# EAGLE board CT_schematic (EAGLE 7.6.0)

Size 100 x 80 mm. Coordinates in mm from the lower left corner, seen from the top.
Outline: 0,0 100,0 100,80 0,80 0,0
Copper layers (1*16): Top 0.035mm / dielectric 1.5mm / Bottom 0.035mm
Design rules "default": minimum track width 10mil, minimum drill 24mil, track to track 8mil, track to pad 8mil, pad to pad 8mil, via to via 8mil, smd to smd 8mil, copper to edge 40mil, drill to drill 8mil, minimum pad ring 10mil, minimum via ring 8mil, stop-mask expansion 4mil, vias tented up to drill 0mil, thermal gap 10mil

## Footprints (pad centres in the part's own frame; a part is rotated, then mirrored left to right if it is on the bottom)
C0603 = smd 0.8 x 0.8: 1 -0.762,0; 2 0.762,0
C0402 = smd 0.5 x 0.5: 1 -0.508,0; 2 0.508,0
C0805 = smd 1.2 x 1.3: 1 -1.016,0; 2 1.016,0
C1210 = smd 1.2 x 2.5: 1 -1.524,0; 2 1.524,0
C1206 = smd 1.3 x 1.6: 1 -1.524,0; 2 1.524,0
EXV-9H = smd 3.505 x 1.676: 1 -2.857,0; 2 2.857,0
L0603 = smd 0.8 x 0.8: 1 -0.762,0; 2 0.762,0
L1210 = smd 1.2 x 2.5: 1 -1.524,0; 2 1.524,0
PJ-037B_PACKAGE = drill 3.7 square: 1 12,0 | drill 3.2 square: 2 6,0
R0603 = smd 0.8 x 0.8: 1 -0.762,0; 2 0.762,0
WLCSP90 = smd 0.25 x 0.25: A1 -1.8,1.6; A2 -1.4,1.6; A3 -1,1.6; A4 -0.6,1.6; A5 -0.2,1.6; A6 0.2,1.6; A7 0.6,1.6; A8 1,1.6; A9 1.4,1.6; A10 1.8,1.6; B1 -1.8,1.2; B2 -1.4,1.2; B3 -1,1.2; B4 -0.6,1.2; B5 -0.2,1.2; B6 0.2,1.2; B7 0.6,1.2; B8 1,1.2; B9 1.4,1.2; B10 1.8,1.2; C1 -1.8,0.8; C2 -1.4,0.8; C3 -1,0.8; C4 -0.6,0.8; C5 -0.2,0.8; C6 0.2,0.8; C7 0.6,0.8; C8 1,0.8; C9 1.4,0.8; C10 1.8,0.8; D1 -1.8,0.4; D2 -1.4,0.4; D3 -1,0.4; D4 -0.6,0.4; D5 -0.2,0.4; D6 0.2,0.4; D7 0.6,0.4; D8 1,0.4; D9 1.4,0.4; D10 1.8,0.4; E1 -1.8,0; E2 -1.4,0; E3 -1,0; E4 -0.6,0; E5 -0.2,0; E6 0.2,0; E7 0.6,0; E8 1,0; E9 1.4,0; E10 1.8,0; F1 -1.8,-0.4; F2 -1.4,-0.4; F3 -1,-0.4; F4 -0.6,-0.4; F5 -0.2,-0.4; F6 0.2,-0.4; F7 0.6,-0.4; F8 1,-0.4; F9 1.4,-0.4; F10 1.8,-0.4; G1 -1.8,-0.8; G2 -1.4,-0.8; G3 -1,-0.8; G4 -0.6,-0.8; G5 -0.2,-0.8; G6 0.2,-0.8; G7 0.6,-0.8; G8 1,-0.8; G9 1.4,-0.8; G10 1.8,-0.8; H1 -1.8,-1.2; H2 -1.4,-1.2; H3 -1,-1.2; H4 -0.6,-1.2; H5 -0.2,-1.2; H6 0.2,-1.2; H7 0.6,-1.2; H8 1,-1.2; H9 1.4,-1.2; H10 1.8,-1.2; J1 -1.8,-1.6; J2 -1.4,-1.6; J3 -1,-1.6; J4 -0.6,-1.6; J5 -0.2,-1.6; J6 0.2,-1.6; J7 0.6,-1.6; J8 1,-1.6; J9 1.4,-1.6; J10 1.8,-1.6
SAMTEC_FTSH-105-01-L-DV-K = smd 0.762 x 2.794: 1 -2.54,-2.032; 2 -2.54,2.032; 3 -1.27,-2.032; 4 -1.27,2.032; 5 0,-2.032; 6 0,2.032; 7 1.27,-2.032; 8 1.27,2.032; 9 2.54,-2.032; 10 2.54,2.032
AT24C02D = smd 1.6 x 0.6: 1 -2.475,1.905 | smd 1.55 x 0.6: 2 -2.475,0.635; 3 -2.475,-0.635; 4 -2.475,-1.905; 5 2.475,-1.905; 6 2.475,-0.635; 7 2.475,0.635; 8 2.475,1.905
SSOP-20 = smd 1.651 x 0.432: 1 -3.48,2.925; 2 -3.48,2.275; 3 -3.48,1.625; 4 -3.48,0.975; 5 -3.48,0.325; 6 -3.48,-0.325; 7 -3.48,-0.975; 8 -3.48,-1.625; 9 -3.48,-2.275; 10 -3.48,-2.925; 11 3.48,-2.925; 12 3.48,-2.275; 13 3.48,-1.625; 14 3.48,-0.975; 15 3.48,-0.325; 16 3.48,0.325; 17 3.48,0.975; 18 3.48,1.625; 19 3.48,2.275; 20 3.48,2.925
HTSS-105-01-G-D = drill 1 pad 1.8 square: 1 0,0 | drill 1 pad 1.8: 2 0,2.54; 3 2.54,0; 4 2.54,2.54; 5 5.08,0; 6 5.08,2.54; 7 7.62,0; 8 7.62,2.54; 9 10.16,0; 10 10.16,2.54
QFN-28 = smd 0.813 x 0.305: 1 -2.451,1.5; 2 -2.451,1; 3 -2.451,0.5; 4 -2.451,0; 5 -2.451,-0.5; 6 -2.451,-1; 7 -2.451,-1.5; 15 2.451,-1.5; 16 2.451,-1; 17 2.451,-0.5; 18 2.451,0; 19 2.451,0.5; 20 2.451,1; 21 2.451,1.5 | smd 0.305 x 0.813: 8 -1.5,-2.451; 9 -1,-2.451; 10 -0.5,-2.451; 11 0,-2.451; 12 0.5,-2.451; 13 1,-2.451; 14 1.5,-2.451; 22 1.5,2.451; 23 1,2.451; 24 0.5,2.451; 25 0,2.451; 26 -0.5,2.451; 27 -1,2.451; 28 -1.5,2.451 | smd 3.607 x 3.607: 29 0,0
SJ-43515TS-SMT-TR = smd 2.2 x 3: 1 0.6,-7.4; 4 3.4,-7.4 | smd 3 x 3: 2 12.8,-7.4; 5 17,-3 | smd 2 x 3: 3 5.3,0; 6 2.5,0 | drill 1.8: P$7 4.5,-3.69; P$8 11.54,-3.69
ABS07-32.768KHZ-7-T = smd 1.1 x 2.4: 1 -2.5,0; 2 0,0
ABLS-12.288MHZ-B4-T = smd 5.6 x 2.8: 1 -3.81,0; 2 5.69,0
ASFL1 = smd 1.7 x 1.5: 1 -1.27,-1.1; 2 1.27,-1.1; 3 1.27,1.1; 4 -1.27,1.1
WSON-8 = smd 0.3 x 0.6: 1 -0.75,0; 2 0.05,0; 3 0.85,0; 4 1.65,0; 5 1.65,3.8; 6 0.85,3.8; 7 0.05,3.8; 8 -0.75,3.8 | smd 3 x 2.6: PAD 0.45,1.9
SON-6 = smd 0.55 x 0.3: 1 -0.355,0.5 | smd 0.52 x 0.3: 2 -0.37,0; 3 -0.37,-0.5; 4 0.37,-0.5; 5 0.37,0; 6 0.37,0.5
SW_4-1437565-2 = smd 1.4 x 2.1: 1 -2.23,4.55; 2 -2.23,-4.55; 3 2.23,4.55; 4 2.23,-4.55
LGM67K-G1J2-24-Z = smd 0.8 x 1.4: A -2,0; C 0,0
NC7SZ125M5X = smd 1.3 x 0.7: 1 -1.3,0.95; 2 -1.3,0; 3 -1.3,-0.95; 4 1.3,-0.95; 5 1.3,0.95

## Placement (x,y rotation side)
C1  1e-06  [C0603]  -66.04,69.85 0 top  (outside the outline)
C2  1e-07  [C0603]  -69.85,69.85 0 top  (outside the outline)
C3  1e-07  [C0603]  -73.66,69.85 0 top  (outside the outline)
C4  1e-07  [C0603]  -77.47,69.85 0 top  (outside the outline)
C5  1e-07  [C0603]  -15.24,74.93 0 top  (outside the outline)
C6  1e-07  [C0603]  -19.05,74.93 0 top  (outside the outline)
C7  1e-07  [C0603]  -22.86,74.93 0 top  (outside the outline)
C8  4.7e-06  [C0603]  -54.61,69.85 0 top  (outside the outline)
C9  1e-08  [C0603]  -26.67,74.93 0 top  (outside the outline)
C10  1e-06  [C0603]  -30.48,74.93 0 top  (outside the outline)
C11  2.2e-06  [C0603]  -58.42,69.85 0 top  (outside the outline)
C12  2.2e-06  [C0603]  -62.23,69.85 0 top  (outside the outline)
C13  1e-11  [C0402]  -22.86,80.01 0 top  (outside the outline)
C14  1e-11  [C0402]  -26.67,80.01 0 top  (outside the outline)
C15  1e-07  [C0402]  -30.48,80.01 0 top  (outside the outline)
C16  1e-08  [C0402]  -34.29,80.01 0 top  (outside the outline)
C17  1e-06  [C0603]  -34.29,74.93 0 top  (outside the outline)
C18  1e-06  [C0603]  -38.1,74.93 0 top  (outside the outline)
C19  1e-06  [C0603]  -41.91,74.93 0 top  (outside the outline)
C20  4.7e-06  [C0805]  -53.34,58.42 0 top  (outside the outline)
C21  2.2e-05  [C1210]  -77.47,50.8 0 top  (outside the outline)
C22  2.2e-05  [C1210]  -16.51,58.42 0 top  (outside the outline)
C23  1e-09  [C0402]  -38.1,80.01 0 top  (outside the outline)
C24  1e-09  [C0402]  -41.91,80.01 0 top  (outside the outline)
C25  1e-07  [C0402]  -45.72,80.01 0 top  (outside the outline)
C26  1e-07  [C0402]  -49.53,80.01 0 top  (outside the outline)
C27  1e-07  [C0402]  -53.34,80.01 0 top  (outside the outline)
C28  1e-07  [C0402]  -57.15,80.01 0 top  (outside the outline)
C29  1e-07  [C0402]  -60.96,80.01 0 top  (outside the outline)
C30  1e-05  [C0805]  -58.42,58.42 0 top  (outside the outline)
C31  1e-05  [C0805]  -63.5,58.42 0 top  (outside the outline)
C32  1e-05  [C0805]  -68.58,58.42 0 top  (outside the outline)
C33  1e-05  [C0805]  -73.66,58.42 0 top  (outside the outline)
C34  1e-05  [C0805]  -78.74,58.42 0 top  (outside the outline)
C35  2.2e-11  [C0402]  -15.24,80.01 0 top  (outside the outline)
C36  2.2e-11  [C0402]  -19.05,80.01 0 top  (outside the outline)
C37  1e-08  [C0402]  -64.77,80.01 0 top  (outside the outline)
C38  1e-08  [C0402]  -68.58,80.01 0 top  (outside the outline)
C39  1e-05  [C1206]  -35.56,58.42 0 top  (outside the outline)
C40  1e-05  [C1210]  -22.86,58.42 0 top  (outside the outline)
C41  1e-07  [C0402]  -72.39,80.01 0 top  (outside the outline)
C42  0.0001  [EXV-9H]  -50.8,43.18 0 top  (outside the outline)
C43  0.0001  [EXV-9H]  -62.23,43.18 0 top  (outside the outline)
C44  1e-08  [C0402]  -76.2,80.01 0 top  (outside the outline)
C45  1e-08  [C0402]  -80.01,80.01 0 top  (outside the outline)
F1  240.0  [L0603]  -45.72,74.93 0 top  (outside the outline)
I1  1.5e-05  [L1210]  -29.21,58.42 0 top  (outside the outline)
J1  PJ-037B  [PJ-037B_PACKAGE]  -55.88,21.59 0 top  (outside the outline)
R2  1000.0  [R0603]  -49.53,74.93 0 top  (outside the outline)
R7  4700.0  [R0603]  -53.34,74.93 0 top  (outside the outline)
R8  2200.0  [R0603]  -57.15,74.93 0 top  (outside the outline)
R10  2200.0  [R0603]  -60.96,74.93 0 top  (outside the outline)
R12  10000.0  [R0603]  -45.72,64.77 0 top  (outside the outline)
R13  10000.0  [R0603]  -50.8,64.77 0 top  (outside the outline)
R14  10000.0  [R0603]  -55.88,64.77 0 top  (outside the outline)
R15  10000.0  [R0603]  -60.96,64.77 0 top  (outside the outline)
R16  10000.0  [R0603]  -66.04,64.77 0 top  (outside the outline)
R17  10000.0  [R0603]  -71.12,64.77 0 top  (outside the outline)
R18  5.0  [R0603]  -64.77,74.93 0 top  (outside the outline)
R19  10000.0  [R0603]  -76.2,64.77 0 top  (outside the outline)
R20  10000.0  [R0603]  -15.24,69.85 0 top  (outside the outline)
R21  10000.0  [R0603]  -20.32,69.85 0 top  (outside the outline)
R22  10000.0  [R0603]  -25.4,69.85 0 top  (outside the outline)
R23  100000.0  [R0603]  -15.24,64.77 0 top  (outside the outline)
R24  100000.0  [R0603]  -20.32,64.77 0 top  (outside the outline)
R25  100000.0  [R0603]  -25.4,64.77 0 top  (outside the outline)
R26  47000.0  [R0603]  -30.48,69.85 0 top  (outside the outline)
R27  47000.0  [R0603]  -35.56,69.85 0 top  (outside the outline)
R28  47000.0  [R0603]  -40.64,69.85 0 top  (outside the outline)
R29  680.0  [R0603]  -68.58,74.93 0 top  (outside the outline)
R30  100000.0  [R0603]  -30.48,64.77 0 top  (outside the outline)
R31  2231.0  [R0603]  -72.39,74.93 0 top  (outside the outline)
R32  1000.0  [R0603]  -76.2,74.93 0 top  (outside the outline)
R33  10000.0  [R0603]  -45.72,69.85 0 top  (outside the outline)
R34  10000.0  [R0603]  -50.8,69.85 0 top  (outside the outline)
R35  9100.0  [R0603]  -80.01,74.93 0 top  (outside the outline)
R36  680000.0  [R0603]  -35.56,64.77 0 top  (outside the outline)
R37  120000.0  [R0603]  -40.64,64.77 0 top  (outside the outline)
U1  STM32F415OGY6  [WLCSP90]  -41.91,43.18 0 top  (outside the outline)
U2  FTSH-105-01-L-DV-K  [SAMTEC_FTSH-105-01-L-DV-K]  -35.56,7.62 0 top  (outside the outline)
U3  AT24C02D-SSHM-T  [AT24C02D]  -44.45,34.29 0 top  (outside the outline)
U4  MAX3218EAP+T  [SSOP-20]  -54.61,33.02 0 top  (outside the outline)
U5  HTSS-105-01-G-D  [HTSS-105-01-G-D]  -27.94,33.02 0 top  (outside the outline)
U6  WM8731CLSEFL  [QFN-28]  -69.85,50.8 0 top  (outside the outline)
U7  SJ-43515TS-SMT-TR  [SJ-43515TS-SMT-TR]  -68.58,10.16 0 top  (outside the outline)
U8  SJ-43515TS-SMT-TR  [SJ-43515TS-SMT-TR]  -39.37,24.13 0 top  (outside the outline)
U9  ABS07-32.768KHZ-7-T  [ABS07-32.768KHZ-7-T]  -48.26,52.07 0 top  (outside the outline)
U10  ABLS-12.288MHZ-B4-T  [ABLS-12.288MHZ-B4-T]  -25.4,52.07 0 top  (outside the outline)
U11  ASFL1-25MHZ-NCS  [ASFL1]  -26.67,43.18 0 top  (outside the outline)
U12  LP3878SDX-ADJ/NOPB  [WSON-8]  -77.47,31.75 0 top  (outside the outline)
U13  TPS3895ADRYR  [SON-6]  -13.97,83.82 0 top  (outside the outline)
U14  4-1437565-2  [SW_4-1437565-2]  -72.39,21.59 0 top  (outside the outline)
U15  Q65110A2395  [LGM67K-G1J2-24-Z]  -57.15,50.8 0 top  (outside the outline)
U16  nc7sz125m5x  [NC7SZ125M5X]  -40.64,58.42 0 top  (outside the outline)
U17  nc7sz125m5x  [NC7SZ125M5X]  -46.99,58.42 0 top  (outside the outline)

## Library data of the parts
C1-C45 F1 I1 J1 R2 R7 R8 R10 R12-R37 U1-U17 = circuit_tree

## Nets
CLK_CRYSTAL_U1_B9: C13.1 U1.B9 U9.1
CLK_CRYSTAL_U1_B10: C14.1 U1.B10 U9.2
CLK_CRYSTAL_U6_1: C35.1 U6.1 U10.1
CLK_CRYSTAL_U6_2: C36.1 U6.2 U10.2
CLK_U1_F10: U1.F10 U11.3
GND: C1.2 C2.2 C3.2 C4.2 C5.2 C6.2 C7.2 C8.2 C9.2 C10.2 C11.2 C12.2 C13.2 C14.2 C15.2 C16.2 C17.2 C18.2 C19.2 C24.2 C25.2 C26.2 C27.2 C28.2 C29.2 C30.2 C31.2 C32.2 C33.2 C34.2 C35.2 C36.2 C37.2 C38.2 C39.2 C40.2 C41.2 C42.2 C43.2 C44.2 C45.2 J1.2 R2.2 R13.2 R14.2 R18.2 R19.2 R21.2 R22.2 R26.2 R27.2 R28.2 R32.2 R35.2 R37.2 U1.C9 U1.E5 U1.E7 U1.E8 U1.H10 U2.3 U2.5 U3.4 U4.5 U4.17 U4.20 U5.9 U6.4 U6.15 U6.19 U6.25 U6.26 U6.29 U7.1 U8.1 U11.2 U12.3 U12.PAD U13.2 U15.C U16.2 U16.3 U17.1 U17.3
NET_U1_A7: R13.1 U1.A7
NET_U1_A8: R12.1 U1.A8
NET_U1_B1: C12.1 U1.B1
NET_U1_B7: R10.1 U1.B7 U3.5
NET_U1_C7: R8.1 U1.C7 U3.6
NET_U1_D9: R14.1 U1.D9
NET_U1_F4: C11.1 U1.F4
NET_U1_G9: C9.1 C10.1 F1.1 U1.G9
NET_U1_G10: R7.1 U1.G10 U17.4
NET_U1_J9: U15.A
NET_U1_J10: U14.3 U14.4
NET_U2_9: R18.1 U2.9
NET_U3_1: R20.1 U3.1
NET_U3_2: R21.1 U3.2
NET_U3_3: R22.1 U3.3
NET_U3_7: R19.1 U3.7
NET_U4_1: I1.1 U4.1
NET_U4_2: R23.1 U4.2
NET_U4_3: R24.1 U4.3
NET_U4_4: R25.1 U4.4
NET_U4_15: C19.1 U4.15
NET_U4_16: C20.2 U4.16
NET_U4_18: C20.1 U4.18
NET_U4_19: C18.1 U4.19
NET_U5_3: U4.12 U5.3
NET_U5_4: U4.11 U5.4
NET_U5_5: U4.14 U5.5
NET_U5_6: U4.13 U5.6
NET_U6_9: U6.9
NET_U6_20: C29.1 C34.1 U6.20
NET_U7_2: C22.1 R27.1 U7.2
NET_U7_5: C21.1 R26.1 U7.5
NET_U7_13: C21.2
NET_U7_14: C22.2
NET_U8_5: C23.1 C24.1 R28.1 R29.1 U8.5
NET_U8_21: R29.2
NET_U8_22: C23.2
NET_U12_1: C38.1 U12.1
NET_U12_6: R31.2 R32.1 U12.6
NET_U12_8: R30.1 U12.8
NET_U13_1: R34.1 R35.1 U13.1
NET_U13_3: R36.2 R37.1 U13.3
NET_U13_4: R33.1 U13.4 U16.4 U17.2
NET_U14_1: R2.1 U14.1 U14.2
PROC_I2S2_CK: U1.B2 U6.7
PROC_I2S2_EXT_SD: U1.D10 U6.10
PROC_I2S2_SD: U1.E9 U6.8
PROC_I2S2_WS: U1.C3 U6.9 U6.11
PROC_SYS_JTCK_SWCLK: R16.1 U1.A2 U2.4
PROC_SYS_JTDO_SWO: U1.B6 U2.6
PROC_SYS_JTMS_SWDIO: R17.1 U1.D4 U2.2
PROC_UART4_RX: U1.C4 U4.9
PROC_UART4_TX: U1.C10 U4.7
RST_OUT_U2_JTAG_RST_B: R15.1 U2.10 U16.1
VCC_S1_9V4: C39.1 C42.1 C43.1 J1.1 R30.2 U12.4
VCC_TIER1_3V3: C1.1 C2.1 C3.1 C4.1 C5.1 C6.1 C7.1 C8.1 C15.1 C16.1 C17.1 C25.1 C26.1 C27.1 C28.1 C30.1 C31.1 C32.1 C33.1 C37.1 C40.1 C41.1 C44.1 C45.1 F1.2 I1.2 R7.2 R8.2 R10.2 R12.2 R15.2 R16.2 R17.2 R20.2 R23.2 R24.2 R25.2 R31.1 R33.2 R34.2 R36.1 U1.A1 U1.A10 U1.B8 U1.E4 U1.E6 U1.F7 U2.1 U3.8 U4.6 U6.3 U6.5 U6.12 U6.18 U11.4 U12.5 U13.6 U16.5 U17.5

## Tracks (layer width: path | path; a pad name or v marks a point on that pad's centre or on a via)
CLK_CRYSTAL_U1_B9  (2 unrouted)
CLK_CRYSTAL_U1_B10  (2 unrouted)
CLK_CRYSTAL_U6_1  (2 unrouted)
CLK_CRYSTAL_U6_2  (2 unrouted)
CLK_U1_F10  (1 unrouted)
GND  (83 unrouted)
NET_U1_A7  (1 unrouted)
NET_U1_A8  (1 unrouted)
NET_U1_B1  (1 unrouted)
NET_U1_B7  (2 unrouted)
NET_U1_C7  (2 unrouted)
NET_U1_D9  (1 unrouted)
NET_U1_F4  (1 unrouted)
NET_U1_G9  (3 unrouted)
NET_U1_G10  (2 unrouted)
NET_U1_J10  (1 unrouted)
NET_U2_9  (1 unrouted)
NET_U3_1  (1 unrouted)
NET_U3_2  (1 unrouted)
NET_U3_3  (1 unrouted)
NET_U3_7  (1 unrouted)
NET_U4_1  (1 unrouted)
NET_U4_2  (1 unrouted)
NET_U4_3  (1 unrouted)
NET_U4_4  (1 unrouted)
NET_U4_15  (1 unrouted)
NET_U4_16  (1 unrouted)
NET_U4_18  (1 unrouted)
NET_U4_19  (1 unrouted)
NET_U5_3  (1 unrouted)
NET_U5_4  (1 unrouted)
NET_U5_5  (1 unrouted)
NET_U5_6  (1 unrouted)
NET_U6_20  (2 unrouted)
NET_U7_2  (2 unrouted)
NET_U7_5  (2 unrouted)
NET_U8_5  (4 unrouted)
NET_U12_1  (1 unrouted)
NET_U12_6  (2 unrouted)
NET_U12_8  (1 unrouted)
NET_U13_1  (2 unrouted)
NET_U13_3  (2 unrouted)
NET_U13_4  (3 unrouted)
NET_U14_1  (2 unrouted)
PROC_I2S2_CK  (1 unrouted)
PROC_I2S2_EXT_SD  (1 unrouted)
PROC_I2S2_SD  (1 unrouted)
PROC_I2S2_WS  (2 unrouted)
PROC_SYS_JTCK_SWCLK  (2 unrouted)
PROC_SYS_JTDO_SWO  (1 unrouted)
PROC_SYS_JTMS_SWDIO  (2 unrouted)
PROC_UART4_RX  (1 unrouted)
PROC_UART4_TX  (1 unrouted)
RST_OUT_U2_JTAG_RST_B  (2 unrouted)
VCC_S1_9V4  (5 unrouted)
VCC_TIER1_3V3  (58 unrouted)